# EAGLE board Schematic_proiect_1 v29 (EAGLE 9.7.0)
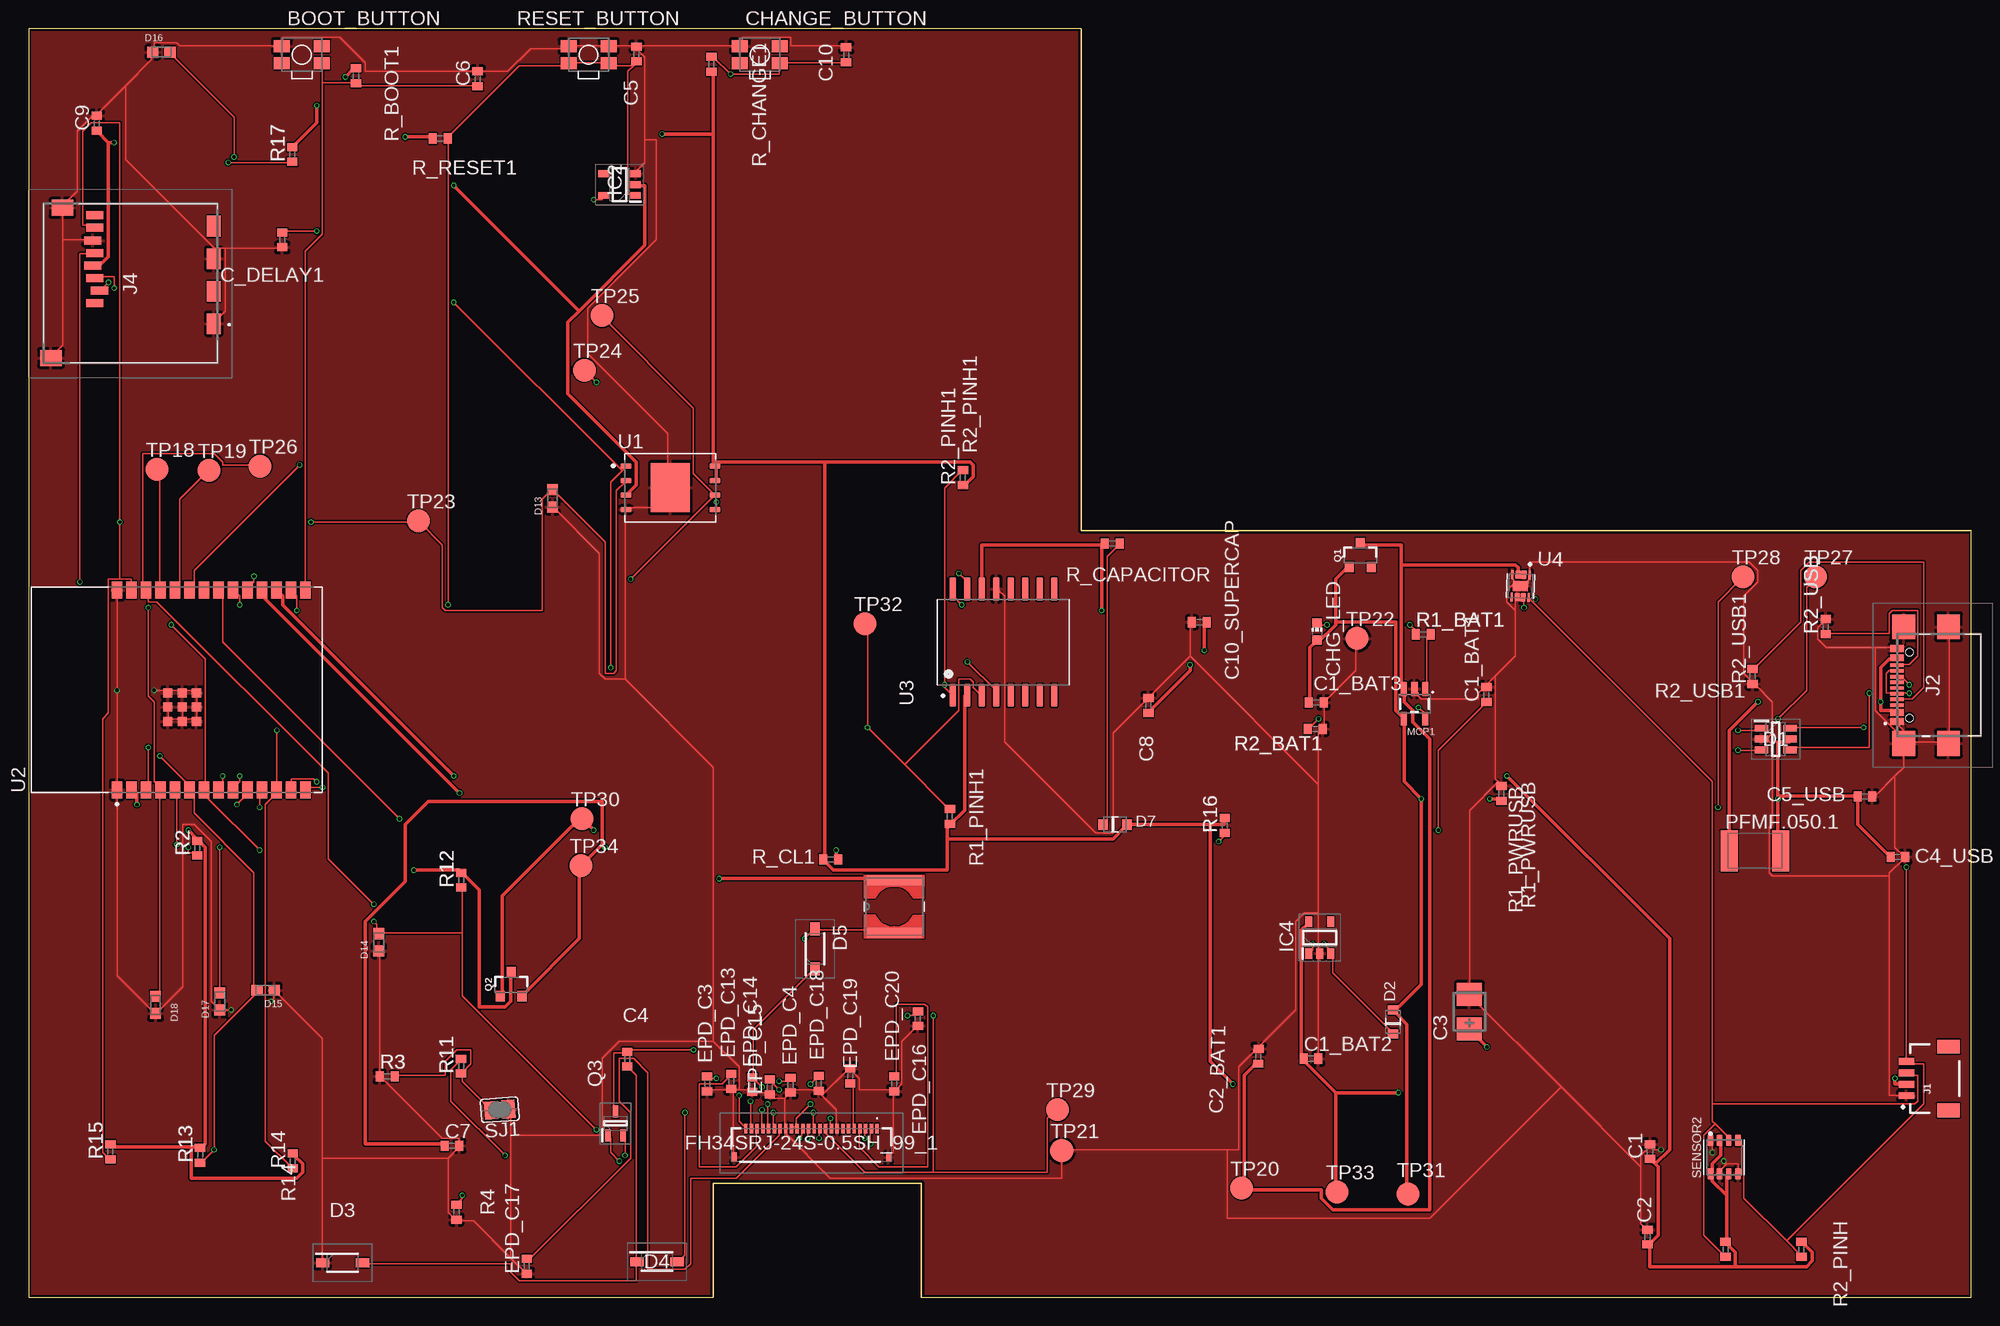
[diagram p0: board, top side]
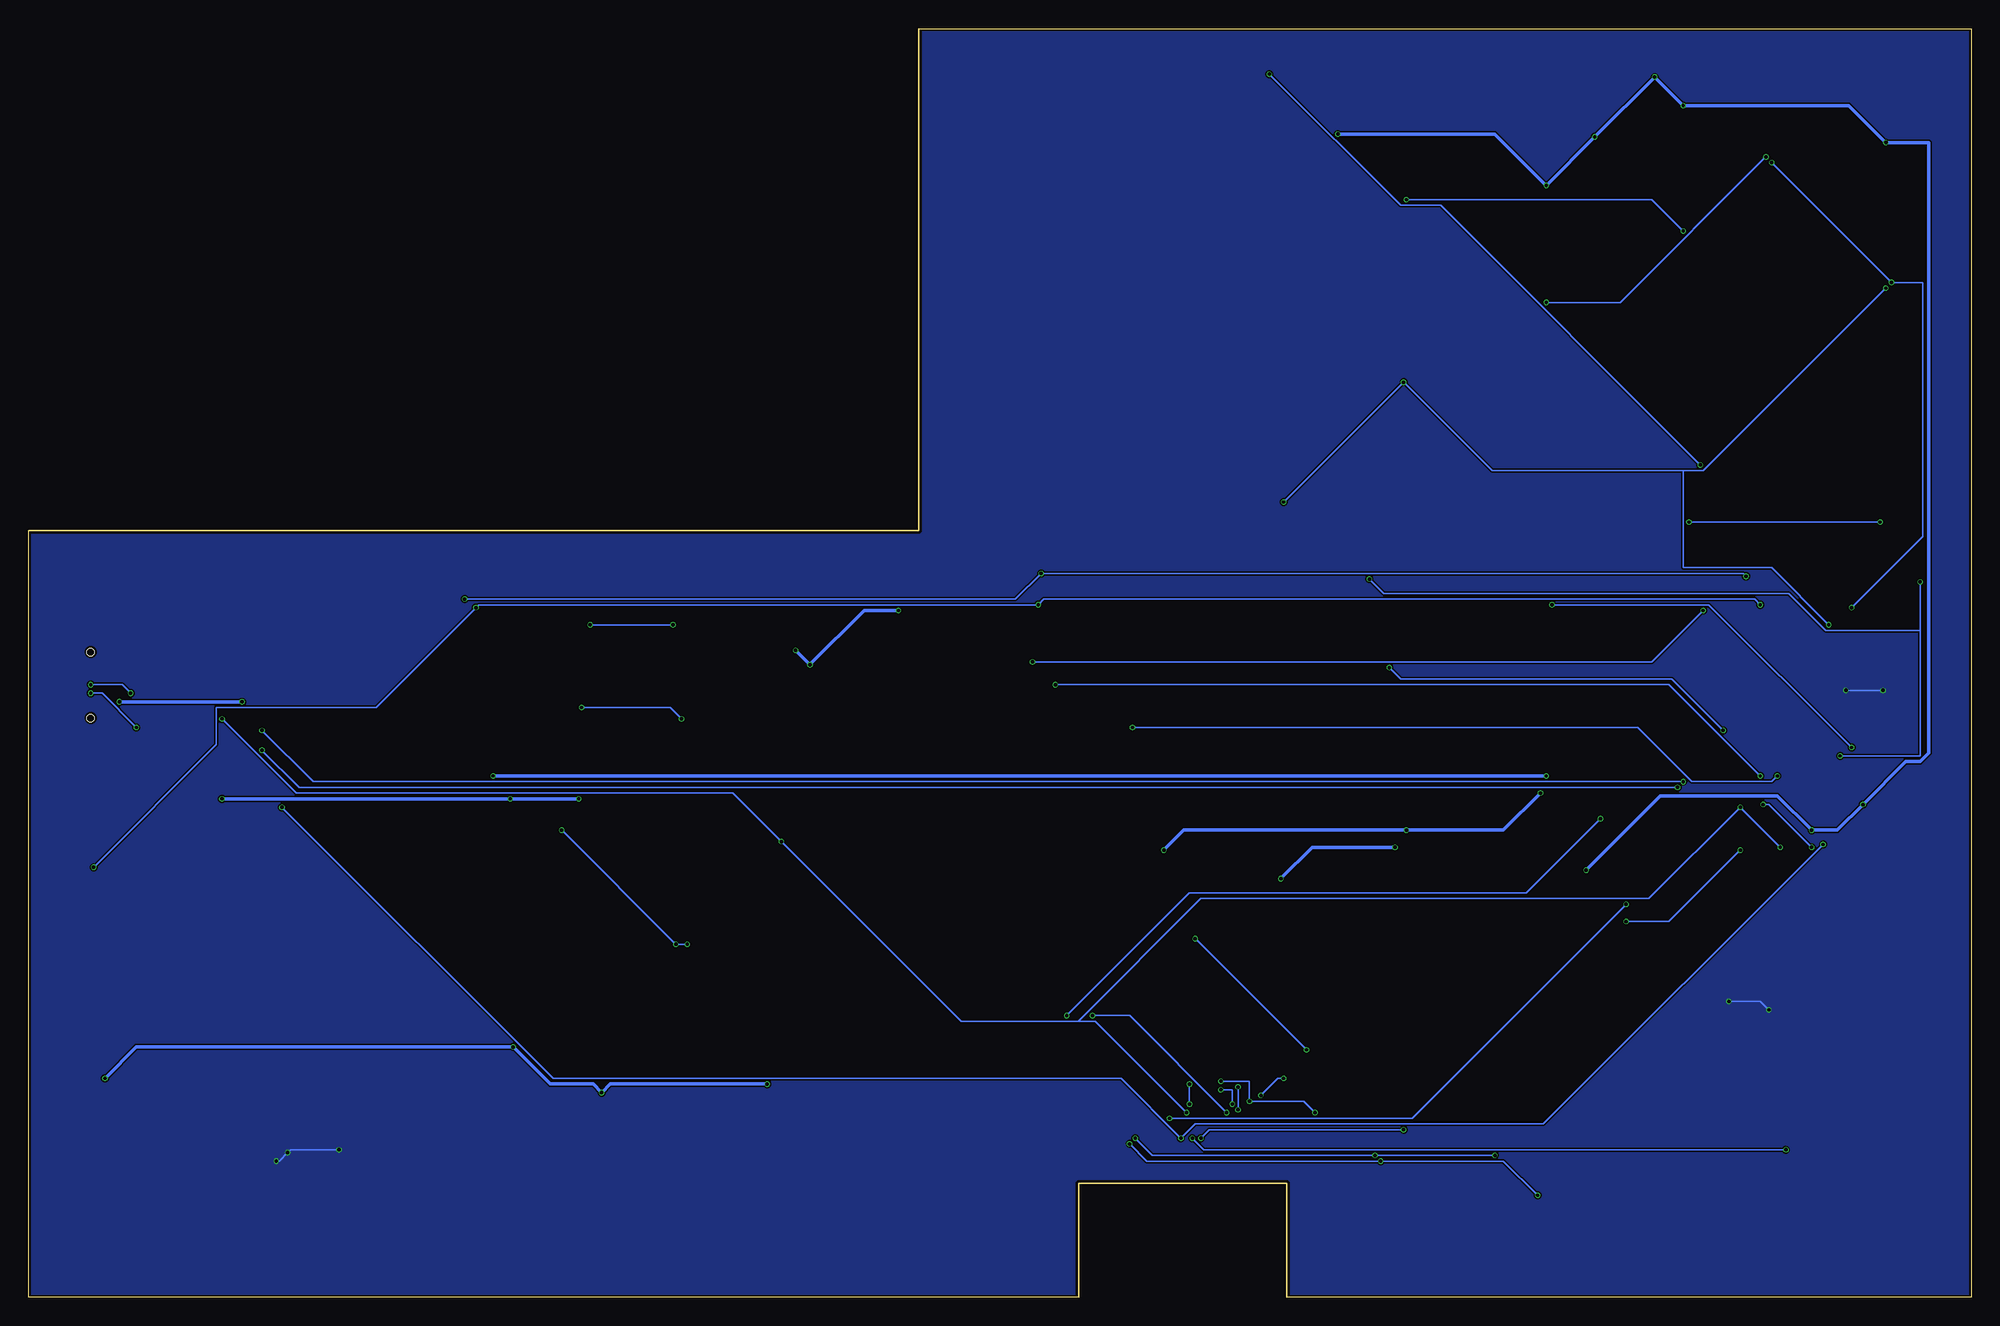
[diagram p1: board, bottom side, seen from below]

Size 170.2 x 111.2 mm. Coordinates in mm from the lower left corner, seen from the top.
Outline: 0,0 60,0 60,10 78.2,10 78.2,0 170.2,0 170.2,67.2 92.2,67.2 92.2,111.2 0,111.2 0,0
Copper layers (1*16): Top 0.035mm / dielectric 1.6mm / Bottom 0.035mm
Design rules "jlcpcb-2layers.dru": minimum track width 5mil, minimum drill 0.3mm, track to track 5mil, track to pad 5mil, pad to pad 5mil, via to via 5mil, smd to smd 5mil, copper to edge 0.2mm, drill to drill 6mil, minimum pad ring 10mil, minimum via ring 3mil, stop-mask expansion 4mil, vias tented up to drill 0mil, thermal gap 10mil
Net classes: 0 default: width 0.15 mm; 1 power: width 0.3 mm

## Footprints (pad centres in the part's own frame; a part is rotated, then mirrored left to right if it is on the bottom)
MYBUTTON = smd 1.4 x 1.05: 1 1.75,0.75; 2 -1.75,0.75; 3 -1.75,-0.75; 4 1.75,-0.75
EAGLE-LTSPICE_C0402 = smd 0.7 x 0.9: 1 -0.65,0; 2 0.65,0
RCL_CT3528 = smd 2 x 2.2: + -1.5,0; - 1.5,0
ADAFRUIT_CHIP-LED0603 = smd 0.8 x 0.8: A 0,-0.75; C 0,0.75
SOT95P280X145-6N = smd 1.2 x 0.6: 1 -1.25,0.95; 2 -1.25,0; 3 -1.25,-0.95; 4 1.25,-0.95; 5 1.25,0; 6 1.25,0.95
ESP32_WROVER_AVX---SD0805S020S1R0_AVX_SD0805S020S1R0_0 = smd 0.8 x 0.9: 1 -1.05,0; 2 1.05,0
SOD3716X135N = smd 1.15 x 0.8: 1 -1.75,0; 2 1.75,0
DIOC1608X36N = smd 0.97 x 0.94: 1 -0.75,0; 2 0.75,0
FH34SRJ24S05SH99 = smd 0.3 x 0.8: 1 5.75,1.45; 2 5.25,1.45; 3 4.75,1.45; 4 4.25,1.45; 5 3.75,1.45; 6 3.25,1.45; 7 2.75,1.45; 8 2.25,1.45; 9 1.75,1.45; 10 1.25,1.45; 11 0.75,1.45; 12 0.25,1.45; 13 -0.25,1.45; 14 -0.75,1.45; 15 -1.25,1.45; 16 -1.75,1.45; 17 -2.25,1.45; 18 -2.75,1.45; 19 -3.25,1.45; 20 -3.75,1.45; 21 -4.25,1.45; 22 -4.75,1.45; 23 -5.25,1.45; 24 -5.75,1.45 | smd 0.4 x 0.8: MP1 6.75,-1.05; MP2 -6.75,-1.05
SOT95P280X125-5N = smd 0.9 x 0.6: 1 -1.4,0.95; 2 -1.4,0; 3 -1.4,-0.95; 4 1.4,-0.95; 5 1.4,0.95
SOT95P280X120-5N = smd 0.9 x 0.6: 1 -1.4,0.95; 2 -1.4,0; 3 -1.4,-0.95; 4 1.4,-0.95; 5 1.4,0.95
JST04_1MM_RA = smd 0.6 x 1.35: 1 -1.5,0; 2 -0.5,0; 3 0.5,0; 4 1.5,0 | smd 1.2 x 2: NC1 2.8,-3.675; NC2 -2.8,-3.675
SAMACSYS_PARTS_USB4110GFA = smd 0.3 x 1.15: A1 -3.35,3.678; A4 -2.55,3.678; A5 -1.25,3.678; A6 -0.25,3.678; A7 0.25,3.678; A8 1.25,3.678; A9 2.55,3.678; A12 3.35,3.678; B1 3.05,3.678; B4 2.25,3.678; B5 1.75,3.678; B6 0.75,3.678; B7 -0.75,3.678; B8 -1.75,3.678; B9 -2.25,3.678; B12 -3.05,3.678 | smd 2.18 x 2: MP1 -5.11,-0.827; MP2 5.11,-0.827; MP3 -5.11,3.103; MP4 5.11,3.103 | hole 0.65: -2.89,2.603; 2.89,2.603
112ATAARR03ATTEND = smd 1.8 x 1.2: G1 10.6,10.4; G2 4.9,10.4; S1 7.75,10.4; S2 2.05,10.4 | smd 1.4 x 1.9: G3 13.6,-3.85; G4 0.45,-2.85 | smd 0.7 x 1.5: P1 8.8,0; P2 7.7,0.4; P3 6.6,0; P4 5.5,-0.2; P5 4.4,0; P6 3.3,-0.2; P7 2.2,0; P8 1.1,0
IND_4828-WE-TPC_WRE = smd 0.889 x 4.826: 1 -2.286,0; 2 2.286,0
ESP32_WROVER_SPARKFUN-IC-POWER_SOT23-5 = smd 0.55 x 1.2: 1 -0.95,-1.3; 2 0,-1.3; 3 0.95,-1.3; 4 0.95,1.3; 5 -0.95,1.3
ESP32C6_VARISTOR_CT/CN1812 = smd 1.5 x 3.6: 1 -2.25,0; 2 2.25,0
ESP32_WROVER_SPARKFUN-DISCRETESEMI_SOT23-3 = smd 0.8 x 0.9: 1 -0.95,-1; 2 0.95,-1; 3 0,1.1
SOT65P210X110-3N = smd 1.05 x 0.5: 1 -1.05,0.65; 2 -1.05,-0.65; 3 1.05,0
ESP32_WROVER_EAGLE-LTSPICE_R0402 = smd 0.7 x 0.9: 1 -0.65,0; 2 0.65,0
ESP32_WROVER_BME680_PSON80P300X300X100-8N = smd 1.016 x 0.5: 1 1.458,1.2; 2 1.458,0.4; 3 1.458,-0.4; 4 1.458,-1.2; 5 -1.458,-1.22; 6 -1.458,-0.4; 7 -1.458,0.4; 8 -1.458,1.2
SJ = smd 1.168 x 1.6: 1 -0.762,0; 2 0.762,0
TP20R = smd 2 x 2: TP 0,0
SON127P600X800X80-9N = smd 0.94 x 0.44: 1 -3.895,1.905; 2 -3.895,0.635; 3 -3.895,-0.635; 4 -3.895,-1.905; 5 3.895,-1.905; 6 3.895,-0.635; 7 3.895,0.635; 8 3.895,1.905 | smd 3.4 x 4.3: 9 0,0
XCVR_ESP32-C6-WROOM-1-N8 = smd 1.5 x 0.9: 1 -8.75,5.26; 2 -8.75,3.99; 3 -8.75,2.72; 4 -8.75,1.45; 5 -8.75,0.18; 6 -8.75,-1.09; 7 -8.75,-2.36; 8 -8.75,-3.63; 9 -8.75,-4.9; 10 -8.75,-6.17; 11 -8.75,-7.44; 12 -8.75,-8.71; 13 -8.75,-9.98; 14 -8.75,-11.25; 15 8.75,-11.25; 16 8.75,-9.98; 17 8.75,-8.71; 18 8.75,-7.44; 19 8.75,-6.17; 20 8.75,-4.9; 21 8.75,-3.63; 22 8.75,-2.36; 23 8.75,-1.09; 24 8.75,0.18; 25 8.75,1.45; 26 8.75,2.72; 27 8.75,3.99; 28 8.75,5.26 | smd 0.8 x 0.8: 29_1 -2.755,0.79; 29_2 -1.505,0.79; 29_3 -0.255,0.79; 29_4 -2.755,-0.46; 29_5 -1.505,-0.46; 29_6 -0.255,-0.46; 29_7 -2.755,-1.71; 29_8 -1.505,-1.71; 29_9 -0.255,-1.71
SOIC127P1032X265-16N = smd 2.05 x 0.59: 1 -4.655,4.445; 2 -4.655,3.175; 3 -4.655,1.905; 4 -4.655,0.635; 5 -4.655,-0.635; 6 -4.655,-1.905; 7 -4.655,-3.175; 8 -4.655,-4.445; 9 4.655,-4.445; 10 4.655,-3.175; 11 4.655,-1.905; 12 4.655,-0.635; 13 4.655,0.635; 14 4.655,1.905; 15 4.655,3.175; 16 4.655,4.445
SON50P200X200X80-9N = smd 0.76 x 0.27: 1 -0.985,0.75; 4 -0.985,-0.75; 5 0.985,-0.75; 8 0.985,0.75 | smd 0.762 x 0.483: 2 -0.985,0.25; 3 -0.985,-0.25; 6 0.985,-0.25; 7 0.985,0.25 | smd 0.9 x 1.3: 9 0,0

## Placement (x,y rotation side)
BOOT_BUTTON  BUTTON_CUSYOMV1  [MYBUTTON]  23.94,108.91 0 top
C1  100uF  [EAGLE-LTSPICE_C0402]  142.04,12.79 90 top
C1_BAT1  4.7uF  [EAGLE-LTSPICE_C0402]  127.71,52.83 90 top
C1_BAT2  4.7uF  [EAGLE-LTSPICE_C0402]  112.35,20.93 0 top
C1_BAT3  4.7uF  [EAGLE-LTSPICE_C0402]  112.79,52.13 0 top
C2  100uF  [EAGLE-LTSPICE_C0402]  141.82,5.29 90 top
C2_BAT1  4.7uF  [EAGLE-LTSPICE_C0402]  107.73,21.13 88.3 top
C3  100uF  [RCL_CT3528]  126.22,25.05 90 top
C4  10uF  [EAGLE-LTSPICE_C0402]  52.45,20.89 90 top
C4_USB  100nF  [EAGLE-LTSPICE_C0402]  163.77,38.61 0 top
C5  1uF  [EAGLE-LTSPICE_C0402]  53.25,108.97 90 top
C5_USB  100nF  [EAGLE-LTSPICE_C0402]  160.88,43.91 0 top
C6  100nF  [EAGLE-LTSPICE_C0402]  39.34,106.79 90 top
C7  10uF  [EAGLE-LTSPICE_C0402]  37.1,13.29 0 top
C8  100uF  [EAGLE-LTSPICE_C0402]  98.1,51.89 90 top
C9  100nF  [EAGLE-LTSPICE_C0402]  5.98,102.89 90 top
C10  100nF  [EAGLE-LTSPICE_C0402]  71.62,108.89 90 top
C10_SUPERCAP  100uF  [EAGLE-LTSPICE_C0402]  102.56,59.17 180 top
C_DELAY1  100nF  [EAGLE-LTSPICE_C0402]  22.23,92.67 90 top
CHANGE_BUTTON  BUTTON_CUSYOMV1  [MYBUTTON]  64.06,108.91 0 top
CHG_LED  [ADAFRUIT_CHIP-LED0603]  112.87,58.35 0 top
D1  USBLC6-2SC6Y  [SOT95P280X145-6N]  153.05,48.93 0 top
D2  ESP32_WROVER_AVX---SD0805S020S1R0_AVX_SD0805S020S1R0_0_0AVX_SD0805S020S1R0_0_0  [ESP32_WROVER_AVX---SD0805S020S1R0_AVX_SD0805S020S1R0_0]  119.52,24.14 90 top
D3  MBR0530  [SOD3716X135N]  27.51,3.04 0 top
D4  MBR0530  [SOD3716X135N]  55.05,3.14 0 top
D5  MBR0530  [SOD3716X135N]  68.89,30.54 90 top
D7  ESP32_WROVER_AVX---SD0805S020S1R0_AVX_SD0805S020S1R0_0_0AVX_SD0805S020S1R0_0_0  [ESP32_WROVER_AVX---SD0805S020S1R0_AVX_SD0805S020S1R0_0]  95.17,41.44 0 top
D13  PGB1010603MR  [DIOC1608X36N]  45.9,70.03 90 top
D14  PGB1010603MR  [DIOC1608X36N]  30.68,31.13 90 top
D15  PGB1010603MR  [DIOC1608X36N]  20.76,26.93 180 top
D16  PGB1010603MR  [DIOC1608X36N]  11.64,109.13 0 top
D17  PGB1010603MR  [DIOC1608X36N]  16.75,25.94 90 top
D18  PGB1010603MR  [DIOC1608X36N]  11.13,25.64 90 top
EPD_C3  1uF/50V  [EAGLE-LTSPICE_C0402]  59.44,18.71 90 top
EPD_C4  1uF/50V  [EAGLE-LTSPICE_C0402]  66.75,18.61 90 top
EPD_C13  1uF/50V  [EAGLE-LTSPICE_C0402]  61.55,18.95 90 top
EPD_C14  1uF/50V  [EAGLE-LTSPICE_C0402]  63.39,18.65 90 top
EPD_C15  1uF/50V  [EAGLE-LTSPICE_C0402]  64.93,18.45 90 top
EPD_C16  1uF/50V  [EAGLE-LTSPICE_C0402]  77.91,24.43 90 top
EPD_C17  1uF/50V  [EAGLE-LTSPICE_C0402]  43.65,2.73 90 top
EPD_C18  0.1uF/50V  [EAGLE-LTSPICE_C0402]  69.23,18.75 90 top
EPD_C19  1uF/50V  [EAGLE-LTSPICE_C0402]  71.99,19.43 270 top
EPD_C20  1uF/50V  [EAGLE-LTSPICE_C0402]  75.83,18.73 90 top
FH34SRJ-24S-0.5SH_99_1  FH34SRJ-24S-0.5SH_99_  [FH34SRJ24S05SH99]  68.58,13.35 0 top
IC2  BD5229G-TR  [SOT95P280X125-5N]  51.77,97.53 180 top
IC4  XC6220A331MR-G  [SOT95P280X120-5N]  113.11,31.53 90 top
J1  QWIIC_RIGHT_ANGLE  [JST04_1MM_RA]  164.51,19.19 90 top
J2  SAMACSYS_PARTS_USB4110-GF-A  [SAMACSYS_PARTS_USB4110GFA]  167.36,53.66 90 top
J4  112A-TAAR-R03_ATTEND  [112ATAARR03ATTEND]  5.82,95.93 270 top
L1  744043680IND_4828-WE-TPC_WRE  [IND_4828-WE-TPC_WRE]  75.83,34.25 89.9 top
MCP1  ESP32_WROVER_SPARKFUN-IC-POWER_MCP73831  [ESP32_WROVER_SPARKFUN-IC-POWER_SOT23-5]  121.41,52.02 180 top
PFMF.050.1  ESP32C6_VARISTORCN1812  [ESP32C6_VARISTOR_CT/CN1812]  151.23,39.14 0 top
Q1  20V/4.2A/52mΩ/1.4W  [ESP32_WROVER_SPARKFUN-DISCRETESEMI_SOT23-3]  116.66,65.01 0 top
Q2  20V/4.2A/52mΩ/1.4W  [ESP32_WROVER_SPARKFUN-DISCRETESEMI_SOT23-3]  42.28,27.41 0 top
Q3  SI1308EDL-T1-GE3  [SOT65P210X110-3N]  51.42,15.24 90 top
R1_BAT1  200  [ESP32_WROVER_EAGLE-LTSPICE_R0402]  122.18,58.11 0 top
R1_PINH  10k  [ESP32_WROVER_EAGLE-LTSPICE_R0402]  148.66,4.21 90 top
R1_PINH1  10k  [ESP32_WROVER_EAGLE-LTSPICE_R0402]  80.71,42.15 90 top
R1_PWRUSB  100k  [ESP32_WROVER_EAGLE-LTSPICE_R0402]  129.02,44.17 270 top
R2  10k  [ESP32_WROVER_EAGLE-LTSPICE_R0402]  14.77,39.37 90 top
R2_BAT1  2K  [ESP32_WROVER_EAGLE-LTSPICE_R0402]  112.72,49.81 180 top
R2_PINH  10k  [ESP32_WROVER_EAGLE-LTSPICE_R0402]  155.3,4.21 90 top
R2_PINH1  10k  [ESP32_WROVER_EAGLE-LTSPICE_R0402]  81.85,71.85 90 top
R2_USB  5k1  [ESP32_WROVER_EAGLE-LTSPICE_R0402]  157.43,58.79 90 top
R2_USB1  5k1  [ESP32_WROVER_EAGLE-LTSPICE_R0402]  151.02,54.43 90 top
R3  2.2  [ESP32_WROVER_EAGLE-LTSPICE_R0402]  31.41,19.37 0 top
R4  10k  [ESP32_WROVER_EAGLE-LTSPICE_R0402]  37.49,7.47 90 top
R11  0.47  [ESP32_WROVER_EAGLE-LTSPICE_R0402]  37.89,20.27 90 top
R12  10K  [ESP32_WROVER_EAGLE-LTSPICE_R0402]  37.91,36.57 90 top
R13  10K  [ESP32_WROVER_EAGLE-LTSPICE_R0402]  15.03,12.47 90 top
R14  10K  [ESP32_WROVER_EAGLE-LTSPICE_R0402]  23.15,11.97 90 top
R15  10K  [ESP32_WROVER_EAGLE-LTSPICE_R0402]  7.17,12.77 90 top
R16  10K  [ESP32_WROVER_EAGLE-LTSPICE_R0402]  104.79,41.37 90 top
R17  10K  [ESP32_WROVER_EAGLE-LTSPICE_R0402]  23.11,100.17 90 top
R_BOOT1  10K  [ESP32_WROVER_EAGLE-LTSPICE_R0402]  28.69,107.05 90 top
R_CAPACITOR  10k  [ESP32_WROVER_EAGLE-LTSPICE_R0402]  94.92,66.07 0 top
R_CHANGE1  10K  [ESP32_WROVER_EAGLE-LTSPICE_R0402]  59.82,108.07 270 top
R_CL1  10k  [ESP32_WROVER_EAGLE-LTSPICE_R0402]  70.26,38.39 180 top
R_RESET1  10K  [ESP32_WROVER_EAGLE-LTSPICE_R0402]  36.06,101.57 180 top
RESET_BUTTON  BUTTON_CUSYOMV1  [MYBUTTON]  49.06,108.91 0 top
SENSOR2  ESP32_WROVER_BME680_BME680  [ESP32_WROVER_BME680_PSON80P300X300X100-8N]  148.54,12.3 90 top
SJ1  [SJ]  41.28,16.45 184.1 top
TP18  TPTP20R  [TP20R]  11.26,72.57 0 top
TP19  TPTP20R  [TP20R]  15.81,72.47 0 top
TP20  TPTP20R  [TP20R]  106.26,9.57 0 top
TP21  TPTP20R  [TP20R]  90.51,12.87 0 top
TP22  TPTP20R  [TP20R]  116.39,57.75 0 top
TP23  TPTP20R  [TP20R]  34.14,68.05 0 top
TP24  TPTP20R  [TP20R]  48.69,81.25 0 top
TP25  TPTP20R  [TP20R]  50.24,86.05 0 top
TP26  TPTP20R  [TP20R]  20.29,72.85 0 top
TP27  TPTP20R  [TP20R]  156.54,63.15 0 top
TP28  TPTP20R  [TP20R]  150.19,63.15 0 top
TP29  TPTP20R  [TP20R]  90.14,16.45 0 top
TP30  TPTP20R  [TP20R]  48.49,41.95 0 top
TP31  TPTP20R  [TP20R]  120.84,9.05 0 top
TP32  TPTP20R  [TP20R]  73.29,59.05 0 top
TP33  TPTP20R  [TP20R]  114.64,9.25 0 top
TP34  TPTP20R  [TP20R]  48.39,37.85 0 top
U1  W25Q512JVEIQ  [SON127P600X800X80-9N]  56.22,70.96 0 top
U2  ESP32-C6-WROOM-1-N8  [XCVR_ESP32-C6-WROOM-1-N8]  13,53.24 90 top
U3  DS3231SN#  [SOIC127P1032X265-16N]  85.39,57.42 90 top
U4  MAX17048G+T10  [SON50P200X200X80-9N]  130.7,62.35 267.8 top

## Library data of the parts
BOOT_BUTTON CHANGE_BUTTON CHG_LED PFMF.050.1 RESET_BUTTON SJ1 TP18-TP34 = DeskAssistant v19 v1
C1 C1_BAT1-C1_BAT3 C2 C2_BAT1 C4 C4_USB C5 C5_USB C6-C10 C10_SUPERCAP C_DELAY1 EPD_C3 EPD_C4 EPD_C13-EPD_C20 = DeskAssistant v19 v1; SPICEMODEL: NONE; SPICEPREFIX: C
C3 = DeskAssistant v19 v1; SPICEPREFIX: C
D1 = DeskAssistant v19 v1; AVAILABILITY: In Stock; CHECK_PRICES: https://www.snapeda.com/parts/USBLC6-2SC6Y/STMicroelectronics/view-part/?ref=eda; DESCRIPTION: 17V Clamp 5A (8/20µs) Ipp Tvs Diode Surface Mount SOT-23-6; MF: STMicroelectronics; MP: USBLC6-2SC6Y; PACKAGE: SOT-23-6 STMicroelectronics; PRICE: None; SNAPEDA_LINK: https://www.snapeda.com/parts/USBLC6-2SC6Y/STMicroelectronics/view-part/?ref=snap
D2 D7 = DeskAssistant v19 v1; CENTROID_NOT_SPECIFIED: No; DATASHEET: http://datasheets.avx.com/schottky.pdf; DIGIKEY_DESCRIPTION: DIODE SCHOTTKY 20V 1A 0805; DIGIKEY_PART_NUMBER: 478-7800-1-ND; LEAD_FREE: yes; MF: AVX; MOUSER_PART_NUMBER: 581-SD0805S020S1R0; PACKAGE: 0805 (2012 metric); PREFIX: D; ROHS: yes; TEMPERATURE_RANGE_HIGH: +125°C; TEMPERATURE_RANGE_LOW: -55°C
D3-D5 = DeskAssistant v19 v1; AVAILABILITY: In Stock; CHECK_PRICES: https://www.snapeda.com/parts/MBR0530/Onsemi/view-part/?ref=eda; DESCRIPTION: Diode Schottky 30 V 500mA Surface Mount SOD-123; MF: ON Semiconductor; MP: MBR0530; PACKAGE: SOD-123-2 ON Semiconductor; PRICE: None; PURCHASE-URL: https://www.snapeda.com/api/url_track_click_mouser/?unipart_id=179458&manufacturer=ON Semiconductor&part_name=MBR0530&search_term=None; SNAPEDA_LINK: https://www.snapeda.com/parts/MBR0530/Onsemi/view-part/?ref=snap
D13-D18 = DeskAssistant v19 v1; AVAILABILITY: In Stock; CHECK_PRICES: https://www.snapeda.com/parts/PGB1010603MR/Littelfuse/view-part/?ref=eda; DESCRIPTION: 150V (Typ) Clamp - Ipp Tvs Diode Surface Mount 0603 (1608 Metric); MF: Littelfuse Inc.; MP: PGB1010603MR; PACKAGE: 0603 Littelfuse Inc.; PRICE: None; PURCHASE-URL: https://www.snapeda.com/api/url_track_click_mouser/?unipart_id=5659453&manufacturer=Littelfuse Inc.&part_name=PGB1010603MR&search_term=None; SNAPEDA_LINK: https://www.snapeda.com/parts/PGB1010603MR/Littelfuse/view-part/?ref=snap
FH34SRJ-24S-0.5SH_99_1 = DeskAssistant v19 v1; DESCRIPTION: 24 Position FFC, FPC Connector Contacts, Top and Bottom 0.020" (0.50mm) Surface Mount, Right Angle; HEIGHT: 1.1mm; MANUFACTURER_NAME: Hirose; MANUFACTURER_PART_NUMBER: FH34SRJ-24S-0.5SH(99); MOUSER_PART_NUMBER: 798-FH34SRJ24S05SH99; MOUSER_PRICE-STOCK: https://www.mouser.co.uk/ProductDetail/Hirose-Connector/FH34SRJ-24S-0.5SH99?qs=vcbW%252B4%252BSTIpKBl5ap9J8Fw%3D%3D
IC2 = DeskAssistant v19 v1; DESCRIPTION: Voltage Detector with Adjustable Delay Time: CMOS processes are utilized to develop high precision, low current consumption CMOS reset ICs that allow arbitrary setting of the delay time. The extensive lineup includes both Nch Open Drain and CMOS output types in a wide range of detection voltages (from 2.3V to 6.0V, in 0.1V steps), enabling selection of the ideal solution based on customer requirements. In addition, the entire series is of course both lead-free and RoHS-compliant.; HEIGHT: 1.25mm; MANUFACTURER_NAME: ROHM Semiconductor; MANUFACTURER_PART_NUMBER: BD5229G-TR; MOUSER_PART_NUMBER: 755-BD5229G-TR; MOUSER_PRICE-STOCK: https://www.mouser.co.uk/ProductDetail/ROHM-Semiconductor/BD5229G-TR?qs=4kLU8WoGk0vvnhrrYwdszw%3D%3D
IC4 = DeskAssistant v19 v1; DESCRIPTION: LDO Voltage Regulators; HEIGHT: 1.2mm; MANUFACTURER_NAME: Torex; MANUFACTURER_PART_NUMBER: XC6220A331MR-G; MOUSER_PART_NUMBER: 865-XC6220A331MR-G; MOUSER_PRICE-STOCK: https://www.mouser.co.uk/ProductDetail/Torex-Semiconductor/XC6220A331MR-G?qs=AsjdqWjXhJ8ZSWznL1J0gg%3D%3D
J1 = DeskAssistant v19 v1; PROD_ID: CONN-13694
J2 = DeskAssistant v19 v1; DESCRIPTION: CONN USB 2.0 TYPE-C R/A SMT; HEIGHT: 3.26mm; MANUFACTURER_NAME: GCT (GLOBAL CONNECTOR TECHNOLOGY); MANUFACTURER_PART_NUMBER: USB4110-GF-A; MOUSER_PART_NUMBER: 640-USB4110-GF-A; MOUSER_PRICE-STOCK: https://www.mouser.co.uk/ProductDetail/GCT/USB4110-GF-A?qs=KUoIvG%2F9IlYiZvIXQjyJeA%3D%3D
J4 = DeskAssistant v19 v1; DESCRIPTION: Micro SD Card Socket, Push-Push Type, Top Mount, SMT, H=1.83mm, 10u; HEIGHT: 1.9mm; MANUFACTURER_NAME: ATTEND; MANUFACTURER_PART_NUMBER: 112A-TAAR-R03 ATTEND
L1 = DeskAssistant v19 v1; COPYRIGHT: Copyright (C) 2024 Ultra Librarian. All rights reserved.; MANUFACTURER_PART_NUMBER: 744043680; MFR_NAME: Wurth Electronics
MCP1 = DeskAssistant v19 v1; PROD_ID: IC-09995
Q1 Q2 = DeskAssistant v19 v1; PROD_ID: TRAN-14388
Q3 = DeskAssistant v19 v1; AVAILABILITY: In Stock; CHECK_PRICES: https://www.snapeda.com/parts/SI1308EDL-T1-GE3/Vishay+Siliconix/view-part/?ref=eda; DESCRIPTION: Si1308EDL-T1-GE3 N-channel MOSFET Transistor, 1.5 A, 30 V, 3-Pin SC-70 | Siliconix / Vishay SI1308EDL-T1-GE3; MF: Vishay Siliconix; MP: SI1308EDL-T1-GE3; PACKAGE: SOT-323 Vishay Semiconductor; PRICE: None; PURCHASE-URL: https://www.snapeda.com/api/url_track_click_mouser/?unipart_id=274603&manufacturer=Vishay Siliconix&part_name=SI1308EDL-T1-GE3&search_term=None; SNAPEDA_LINK: https://www.snapeda.com/parts/SI1308EDL-T1-GE3/Vishay+Siliconix/view-part/?ref=snap
R1_BAT1 R1_PINH R1_PINH1 R1_PWRUSB R2 R2_BAT1 R2_PINH R2_PINH1 R2_USB R2_USB1 R3 R4 R11-R17 R_BOOT1 R_CAPACITOR R_CHANGE1 R_CL1 R_RESET1 = DeskAssistant v19 v1; SPICEMODEL: NONE; SPICEPREFIX: R
SENSOR2 = DeskAssistant v19 v1; AVAILABILITY: Unavailable; DESCRIPTION: Integrated Environmental Unit; MF: Bosch Sensortec; MP: BME680; PACKAGE: LGA-8 Bosch Tools; PRICE: None
U1 = DeskAssistant v19 v1; AVAILABILITY: In Stock; CHECK_PRICES: https://www.snapeda.com/parts/W25Q512JVEIQ/Winbond+Electronics/view-part/?ref=eda; DESCRIPTION: FLASH - NOR Memory IC 512Mb (64M x 8) SPI - Quad I/O 133 MHz 8-WSON (8x6); MF: Winbond Electronics; MP: W25Q512JVEIQ; PACKAGE: Package; PRICE: None; SNAPEDA_LINK: https://www.snapeda.com/parts/W25Q512JVEIQ/Winbond+Electronics/view-part/?ref=snap
U2 = DeskAssistant v19 v1; AVAILABILITY: In Stock; CHECK_PRICES: https://www.snapeda.com/parts/ESP32-C6-WROOM-1-N8/Espressif+Systems/view-part/?ref=eda; DESCRIPTION: Multiprotocol Modules ESP32-C6 module, Wi-Fi 6 in 2.4 GHz band, Bluetooth 5, Zigbee 3.0 and Thread. ESP34-WROOM Compatible - ENGINEERING SAMPLE; MF: Espressif Systems; MP: ESP32-C6-WROOM-1-N8; PACKAGE: None; PRICE: None; SNAPEDA_LINK: https://www.snapeda.com/parts/ESP32-C6-WROOM-1-N8/Espressif+Systems/view-part/?ref=snap
U3 = DeskAssistant v19 v1; AVAILABILITY: In Stock; CHECK_PRICES: https://www.snapeda.com/parts/DS3231SN%23/Analog+Devices/view-part/?ref=eda; DESCRIPTION: Extremely Accurate I²C-Integrated RTC/TCXO/Crystal; MF: Analog Devices; MP: DS3231SN#; PACKAGE: SOIC-16 Maxim; PRICE: None; PURCHASE-URL: https://www.snapeda.com/api/url_track_click_mouser/?unipart_id=99048&manufacturer=Analog Devices&part_name=DS3231SN#&search_term=None; SNAPEDA_LINK: https://www.snapeda.com/parts/DS3231SN%23/Analog+Devices/view-part/?ref=snap
U4 = DeskAssistant v19 v1; AVAILABILITY: In Stock; CHECK_PRICES: https://www.snapeda.com/parts/MAX17048G+T10/Analog+Devices/view-part/?ref=eda; DESCRIPTION: 3µA 1-Cell/2-Cell Fuel Gauge with ModelGauge; MF: Analog Devices; MP: MAX17048G+T10; PACKAGE: TDFN-8 Maxim; PRICE: None; PURCHASE-URL: https://www.snapeda.com/api/url_track_click_mouser/?unipart_id=329239&manufacturer=Analog Devices&part_name=MAX17048G+T10&search_term=None; SNAPEDA_LINK: https://www.snapeda.com/parts/MAX17048G+T10/Analog+Devices/view-part/?ref=snap

## Nets
3V3 [power]: C1_BAT2.1 C3.+ C9.1 D7.2 IC2.2 IC4.5 J1.2 J4.P4 Q2.3 R1_PINH1.1 R2.2 R2_PINH1.1 R12.2 R13.2 R14.2 R15.2 R16.2 R17.2 R_BOOT1.2 R_CHANGE1.2 R_CL1.2 R_RESET1.2 TP33.TP U1.3 U1.7 U1.8 U2.2 U3.2
32KHZ: R2_PINH1.2 U2.9 U3.1
DN: D1.6 J2.A8 J2.B7
DP: D1.4 J2.A7 J2.B6
EPD_3V3 [power]: C7.1 L1.2 Q2.2 TP34.TP
EPD_3V3_C [power]: Q2.1 R_CL1.1 TP30.TP U2.18
EPD_BUSY: FH34SRJ-24S-0.5SH_99_1.9 TP26.TP U2.26
EPD_CS: D17.2 FH34SRJ-24S-0.5SH_99_1.12 R16.1 TP27.TP U2.11
EPD_DC: FH34SRJ-24S-0.5SH_99_1.11 TP28.TP U2.5
EPD_RST: FH34SRJ-24S-0.5SH_99_1.10 TP29.TP U2.21
FLASH_CS: D16.2 R14.1 U1.1 U2.12
GDR: FH34SRJ-24S-0.5SH_99_1.2 Q3.1 R4.2
GND: BOOT_BUTTON.2 C1.2 C1_BAT1.2 C1_BAT2.2 C1_BAT3.2 C2.2 C2_BAT1.2 C3.- C4_USB.2 C5.2 C5_USB.2 C6.2 C7.2 C8.2 C9.2 C10.2 C10_SUPERCAP.2 C_DELAY1.1 CHANGE_BUTTON.2 D1.2 D3.1 D13.1 D14.1 D15.1 D16.1 D17.1 D18.1 EPD_C3.1 EPD_C4.1 EPD_C13.1 EPD_C14.1 EPD_C15.1 EPD_C16.1 EPD_C17.1 EPD_C18.1 EPD_C19.1 EPD_C20.1 FH34SRJ-24S-0.5SH_99_1.8 FH34SRJ-24S-0.5SH_99_1.17 FH34SRJ-24S-0.5SH_99_1.MP1 FH34SRJ-24S-0.5SH_99_1.MP2 IC2.3 IC4.2 J1.1 J2.A1 J2.A12 J2.B1 J2.B12 J2.MP1 J2.MP2 J2.MP3 J2.MP4 J4.G1 J4.G2 J4.G3 J4.G4 J4.P6 MCP1.2 R1_PWRUSB.1 R2_BAT1.1 R2_USB1.1 R2_USB.2 R3.1 R4.1 RESET_BUTTON.1 RESET_BUTTON.2 SENSOR2.1 SENSOR2.5 SENSOR2.7 SJ1.1 TP21.TP TP22.TP U1.4 U1.9 U2.1 U2.28 U2.29_1 U2.29_2 U2.29_3 U2.29_4 U2.29_5 U2.29_6 U2.29_7 U2.29_8 U2.29_9 U3.13 U4.1 U4.4 U4.6 U4.9
GPIO8: R2.1 U2.10
I2C_PW [power]: C1.1 C2.1 R1_PINH.2 R2_PINH.2 SENSOR2.2 SENSOR2.6 SENSOR2.8 U2.17
INT_RTC: R1_PINH1.2 TP32.TP U2.8 U3.3
IO/BOOT: BOOT_BUTTON.4 C6.1 R_BOOT1.1 U2.15
IO/CHANGE: C10.1 CHANGE_BUTTON.4 R_CHANGE1.1 U2.23
MISO: D13.2 J4.P7 R15.1 TP23.TP U1.2 U2.27
MOSI: D14.2 FH34SRJ-24S-0.5SH_99_1.14 J4.P3 R12.1 TP24.TP U1.5 U2.7
N$1: EPD_C13.2 FH34SRJ-24S-0.5SH_99_1.22
N$11: J2.A5 R2_USB1.2
N$12: EPD_C18.2 FH34SRJ-24S-0.5SH_99_1.15 FH34SRJ-24S-0.5SH_99_1.16
N$15: J2.B5 R2_USB.1
N$16: C1_BAT1.1 D2.1 IC4.1 IC4.3
N$17: C4.1 D3.2 D4.1
N$18: MCP1.1 R1_BAT1.2
N$19: CHG_LED.C R1_BAT1.1
N$20: MCP1.5 R2_BAT1.2
N$21: EPD_C3.2 FH34SRJ-24S-0.5SH_99_1.24
N$22: EPD_C15.2 FH34SRJ-24S-0.5SH_99_1.20
N$23: EPD_C16.2 FH34SRJ-24S-0.5SH_99_1.19
N$24: EPD_C17.2 FH34SRJ-24S-0.5SH_99_1.18
N$25: EPD_C19.2 FH34SRJ-24S-0.5SH_99_1.5
N$26: EPD_C20.2 FH34SRJ-24S-0.5SH_99_1.4
N$27: C_DELAY1.2 IC2.5
N$28: D7.1 R_CAPACITOR.2
PREVGH: D5.1 EPD_C14.2 FH34SRJ-24S-0.5SH_99_1.21
PREVGL: D4.2 EPD_C4.2 FH34SRJ-24S-0.5SH_99_1.23
RESE: FH34SRJ-24S-0.5SH_99_1.3 Q3.2 R11.2
RESE': R3.2 R11.1 SJ1.2
RESET: C5.1 IC2.1 R_RESET1.1 RESET_BUTTON.3 RESET_BUTTON.4 U2.3
RTC_RST: U2.16 U3.4
RX: TP19.TP U2.24
SCK: D15.2 FH34SRJ-24S-0.5SH_99_1.13 J4.P5 R13.1 TP25.TP U1.6 U2.6
SCL: J1.4 R2_PINH.1 SENSOR2.4 U2.20 U3.16 U4.7
SDA: J1.3 R1_PINH.1 SENSOR2.3 U2.19 U3.15 U4.8
SRC: C4.2 D5.2 L1.1 Q3.3
SS_SD: D18.2 J4.P2 R17.1 U2.4
TX: TP18.TP U2.25
USB_D+: D1.3 U2.14
USB_D-: D1.1 U2.13
VBAT [power]: C2_BAT1.1 MCP1.3 Q1.3 TP20.TP U4.2 U4.3
VBUS [power]: C1_BAT3.1 C4_USB.1 C5_USB.1 CHG_LED.A D1.5 D2.2 MCP1.4 PFMF.050.1.2 Q1.1 R1_PWRUSB.2 TP31.TP
VRTC [power]: C8.1 C10_SUPERCAP.1 R_CAPACITOR.1 U3.14
VUSB [power]: J2.A4 J2.A9 J2.B4 J2.B9 PFMF.050.1.1

## Tracks (layer width: path | path; a pad name or v marks a point on that pad's centre or on a via)
3V3  (via drill 0.3)
  Top 0.3: Q2.3 42.25,28.45 42.25,25.95 41.75,25.45 39.5,25.45 39.5,35.7 38,37.2 R12.2 37.75,37.45 v33.75,37.45 | 14.25,13.2 7.25,13.2 R15.2 | 14.25,13.2 15,13.2 R13.2 15.25,13.2 15.5,13.45 15.5,39.45 15,39.95 R2.2 14.75,40.2 v14,40.95 | 14.25,13.2 14.25,10.45 23.5,10.45 24,10.95 24,11.7 23.25,12.45 R14.2 | v9.5,43.2 9.5,44.2 9.25,44.45 U2.2 | 48.25,86.45 47.25,85.45 47.25,79.2 53.25,73.2 53.25,71.2 52.5,70.45 U1.3 | 48.25,86.45 54,92.2 54,97.45 53.25,97.45 IC2.2 | 7,101.2 6,102.2 C9.1 | 7,101.2 7,91.2 6.25,90.45 5.75,90.45 J4.P4 | v25.25,104.45 25.25,102.95 23.25,100.95 R17.2 | v27.75,106.95 28.5,107.7 R_BOOT1.2 | v33,101.7 35.25,101.7 R_RESET1.2 | v7.5,101.2 7,101.2 | v37.25,97.45 48.25,86.45 | 114.5,17.95 111.75,20.7 C1_BAT2.1 111.5,20.95 111.5,32.2 112,32.7 IC4.5 | 114.5,17.95 114.5,9.45 TP33.TP | v163.5,19.2 163.5,18.7 J1.2 | v127.75,21.95 126.25,23.45 C3.+ | v120,17.95 114.5,17.95 | 103.5,41.45 104.75,41.45 104.75,41.95 R16.2 | 103.5,41.45 96.25,41.45 D7.2 96,41.2 95,40.2 80.5,40.2 | 80.5,40.2 80.5,41.45 R1_PINH1.1 80.75,41.45 82,42.7 82,52.7 U3.2 | 80.5,40.2 80.5,37.45 70.5,37.45 69.75,38.2 R_CL1.2 69.75,38.45 69.75,73.2 | 60,73.2 60,72.95 U1.8 60.25,72.7 60.25,71.7 U1.7 | 60,73.2 60,101.95 | 60,101.95 60,107.2 R_CHANGE1.2 | 60,73.2 69.75,73.2 | 69.75,73.2 82.5,73.2 82.75,72.95 82.75,71.95 82,71.2 R2_PINH1.1 | v105.5,18.7 103.5,20.7 103.5,41.45 | 60,101.95 v55.5,101.95
  Bottom 0.3: v33.75,37.45 27.25,43.95 17,43.95 v14,40.95 11.75,40.95 v9.5,43.2 5.75,46.95 4.5,46.95 3.75,47.7 3.75,101.2 v7.5,101.2 10.75,104.45 v25.25,104.45 v27.75,106.95 v33,101.7 v37.25,97.45 41.75,101.95 v55.5,101.95 | v163.5,19.2 160.75,21.95 v127.75,21.95 124.5,18.7 120.75,18.7 v120,17.95 119.25,18.7 v105.5,18.7
32KHZ  (via drill 0.3)
  Top 0.15: R2_PINH1.2 81.75,72.45 80.25,70.95 v80.25,53.7 80.25,53.45 80.75,52.95 U3.1 | v18.5,45.7 18.5,45.2 18,44.7 U2.9
  Bottom 0.15: v18.5,45.7 26.5,53.7 v80.25,53.7
DN  (via drill 0.3)
  Top 0.15: J2.A8 163.5,54.95 163,54.95 162.75,54.7 162.75,52.95 163.5,52.95 J2.B7 163.75,52.95 v164.75,52.95 | v160.75,49.95 154.5,49.95 D1.6
  Bottom 0.15: v160.75,49.95 163.75,52.95 v164.75,52.95
DP  (via drill 0.3)
  Top 0.15: 163.75,54.2 163.75,54.45 J2.B6 | 163.75,54.2 163.75,53.95 J2.A7 | v161.25,52.95 161.25,48.2 154.5,48.2 D1.4 | v164.75,53.7 164.25,54.2 163.75,54.2
  Bottom 0.15: v161.25,52.95 162,53.7 v164.75,53.7
EPD_3V3  (via drill 0.3)
  Top 0.3: 50.25,39.7 50.25,43.45 35,43.45 33,41.45 33,36.45 29.5,32.95 29.5,13.45 36.25,13.45 C7.1 | 50.25,39.7 48.5,37.95 TP34.TP 48.25,37.7 48.25,31.45 43.25,26.45 Q2.2 | v60.5,36.7 75.75,36.7 L1.2 | 50.25,39.7 v50.5,39.45
  Bottom 0.3: v60.5,36.7 57.75,39.45 v50.5,39.45
EPD_3V3_C  (via drill 0.3)
  Top 0.3: Q2.1 41.5,26.45 41.5,35.2 48.25,41.95 TP30.TP v49.5,40.95 | v70.75,39.2 70.75,38.45 R_CL1.1 | v37.75,44.2 20.75,61.2 20.75,61.7 20.5,61.95 U2.18
  Bottom 0.3: v70.75,39.2 69,40.95 v49.5,40.95 41,40.95 v37.75,44.2
EPD_BUSY  (via drill 0.3)
  Top 0.15: v70.25,15.7 70.25,14.95 FH34SRJ-24S-0.5SH_99_1.9 | v30.25,34.45 26.25,38.45 26.25,45.95 11.25,60.95 10.5,60.95 10.5,61.95 U2.26 10.25,62.2 10,62.45 10,73.95 16.25,73.95 17,73.2 17,72.95 20.25,72.95 TP26.TP
  Bottom 0.15: v70.25,15.7 49,15.7 v30.25,34.45
EPD_CS  (via drill 0.3)
  Top 0.15: v16.75,39.45 D17.2 | v20.25,42.95 20.25,44.45 U2.11 | v68.75,16.2 68.75,14.95 FH34SRJ-24S-0.5SH_99_1.12 | v104.25,39.95 104.75,40.45 104.75,40.7 R16.1 | v153.25,50.7 155.75,53.2 155.75,62.2 156.5,62.95 TP27.TP
  Bottom 0.15: v16.75,39.45 v20.25,42.95 28.25,34.95 67.5,34.95 78.25,24.2 | v68.75,16.2 76.75,24.2 78.25,24.2 | 78.25,24.2 88.5,24.2 v104.25,39.95 108.5,44.2 146.75,44.2 v153.25,50.7
EPD_DC  (via drill 0.3)
  Top 0.15: v69.25,13.95 69.25,14.7 FH34SRJ-24S-0.5SH_99_1.11 | v13,39.7 13,44.45 U2.5 | v148,42.95 148,60.95 150,62.95 TP28.TP
  Bottom 0.15: v13,39.7 37.5,15.2 68,15.2 v69.25,13.95 74.5,19.2 124.25,19.2 v148,42.95
EPD_RST  (via drill 0.3)
  Top 0.15: 79.25,10.95 89.25,10.95 89.25,15.7 90,16.45 TP29.TP | 79.25,10.95 73.25,10.95 69.75,14.45 69.75,14.7 FH34SRJ-24S-0.5SH_99_1.10 | v32.5,41.95 17,57.45 17,61.7 16.75,61.95 U2.21 | 79.25,10.95 v79.25,24.7
  Bottom 0.15: v32.5,41.95 39,35.45 68.5,35.45 v79.25,24.7
FLASH_CS  (via drill 0.3)
  Top 0.15: R14.1 23,11.45 20.75,13.7 20.75,43.2 21.5,43.95 21.5,44.45 U2.12 21.75,44.7 v21.75,49.7 | 52,72.45 51,71.45 v51,55.2 | 52,72.45 52.25,72.7 U1.1 | v18,99.95 18,103.45 12.5,108.95 D16.2 | 52,72.45 v37.25,87.2
  Bottom 0.15: v51,55.2 50,54.2 26.25,54.2 v21.75,49.7 | v18,99.95 30.75,87.2 v37.25,87.2
GDR  (via drill 0.3)
  Top 0.15: v73.75,13.45 73.75,14.7 FH34SRJ-24S-0.5SH_99_1.2 | v51.75,11.95 51,12.7 51,13.95 Q3.1 | v38,8.95 38,8.7 37.5,8.2 R4.2
  Bottom 0.15: v73.75,13.45 72.25,11.95 v51.75,11.95 41,11.95 v38,8.95
GND  (via drill 0.3)
  Top 0.15: 161.75,56.95 163.5,56.95 J2.A12 163.75,56.95 | 161.75,56.95 157.5,56.95 156.75,57.7 156.75,58.7 157.25,59.2 R2_USB.2 | 163.75,56.95 163.75,56.7 J2.B1 | 163.75,56.95 163.75,58.2 164.25,58.7 J2.MP4 | 152.25,48.95 152,48.7 D1.2 152.25,48.95 | 152.25,48.95 152.75,49.45 152.75,52.2 151.25,53.7 R2_USB1.1 151,53.95 150.25,54.7 150.25,61.45 151.5,62.7 151.5,63.7 150.75,64.45 131.5,64.45 131.5,63.45 U4.1 131.5,63.2 131.5,62.95 130.75,62.2 U4.9 | J2.B12 163.75,50.7 163.75,50.45 J2.A1 163.75,50.2 164.25,49.7 164.25,48.95 | 163.5,45.7 164.25,46.45 164.25,48.45 J2.MP3 | 163.5,45.7 161.75,43.95 C5_USB.2 | 163.5,45.7 163.5,39.45 164.25,38.7 C4_USB.2 164.25,38.45 163,37.2 163,36.95 | 164.25,48.95 164.25,48.7 J2.MP3 | 163,36.95 163,17.7 J1.1 | J2.MP3 164.5,48.7 168,48.7 J2.MP1 168.25,48.7 168.25,58.7 J2.MP2 | 152.25,48.95 152.75,48.45 152.75,41.45 152.5,41.2 152.5,37.2 152.75,36.95 163,36.95 | 161.75,56.95 161.75,51.45 164.25,48.95 | 164.25,48.95 J2.MP3 | 130.25,62.7 130.5,62.45 U4.9 | 130.25,62.7 130,62.95 130,63.2 U4.4 | 130.25,60.2 130.25,56.2 128.5,54.45 | 130.25,60.2 130.25,61.2 U4.6 | 128.5,54.45 127.75,53.7 C1_BAT1.2 127.5,53.45 127,52.95 127,52.45 122,52.45 121.75,52.7 121.75,52.95 121.5,53.2 MCP1.2 | 128.75,45.2 128.5,45.45 128.5,54.45 | 128.75,45.2 129,44.95 R1_PWRUSB.1 | 130.25,62.7 129.5,61.95 129.5,60.95 130.25,60.2 | 130.25,62.7 U4.9 | 148.75,11.7 148.25,11.2 148.25,10.95 SENSOR2.7 | 148.75,11.7 149.75,11.7 149.75,10.95 SENSOR2.5 | v147.5,12.7 147.5,13.7 SENSOR2.1 | 148.75,11.7 v148.5,11.95 | 141.25,11.45 141.25,12.45 142,13.2 C1.2 142.25,13.2 142.25,12.95 v143,12.95
  Top 0.15: 141.25,11.45 141.25,6.45 141.75,5.95 C2.2 | 141.25,11.45 134.25,18.45 | 134.25,18.45 126.25,26.45 C3.- 126.25,26.7 126.25,42.7 128.75,45.2 | C10.2 71.5,109.7 66.75,109.7 66.75,110.45 62.5,110.45 62.5,109.7 CHANGE_BUTTON.2 62.25,109.7 53.25,109.7 | 54,101.45 54,108.7 53.25,109.45 C5.2 53.25,109.7 | 54,101.45 54,99.45 53.25,98.7 IC2.3 | 53.25,109.7 51,109.7 RESET_BUTTON.1 50.75,109.7 47.5,109.7 RESET_BUTTON.2 47.25,109.45 44,109.45 42,107.45 39.5,107.45 C6.2 39.25,107.45 29.5,107.45 29.5,108.2 27.25,110.45 22.25,110.45 22.25,109.7 BOOT_BUTTON.2 22,109.7 13.25,109.7 13,109.95 11,109.95 11,109.2 D16.1 10.75,108.95 10.75,108.45 8.5,106.2 | 3,92.7 5.5,92.7 J4.P6 | 3,92.7 3,95.45 J4.G4 3,95.7 4.25,96.95 4.25,102.2 5.75,103.7 C9.2 6,103.7 8.5,106.2 | 3,92.7 3,83.45 2,82.45 J4.G3 | 16.25,91.95 17.25,91.95 | 17.25,91.95 22,91.95 C_DELAY1.1 | 16.25,91.95 16.25,91.2 J4.G2 | 17.25,91.95 17.25,86.45 16.25,85.45 J4.G1 | 16.25,91.95 8.5,99.7 8.5,106.2 | 12.25,50.7 12.25,51.7 U2.29_2 | 13.5,50.7 13.5,51.7 U2.29_5 | 12.25,50.7 13.25,50.7 U2.29_4 13.5,50.7 | 12.25,50.7 U2.29_1 | 13.5,50.7 14.5,50.7 U2.29_7 14.75,50.7 14.75,51.7 U2.29_8 14.75,51.95 14.75,52.95 U2.29_9 14.5,53.2 13.5,53.2 U2.29_6 13.25,53.2 12.25,53.2 U2.29_3 12,53.2 v11,53.2 | D17.1 16,25.95 16,39.95 14.5,41.45 13.5,41.45 13.5,27.2 11.25,24.95 D18.1 11,24.95 7.75,28.2 7.75,44.45 U2.1 7.75,44.7 v7.75,53.2 7.75,61.95 U2.28 | 25.75,12.2 25.75,3.2 D3.1 | 25.75,12.2 25.75,22.7 21.75,26.7 D15.1 21.5,26.7 21.5,26.2 v21.25,25.95 | D14.1 30.75,30.2 30.75,19.45 R3.1 31,19.2 36.25,13.95 37.75,13.95 C7.2 37.75,13.2 36.75,12.2
  Top 0.15: 36.75,12.2 36.75,7.45 37.25,6.95 R4.1 37.5,6.7 39,6.7 42.25,3.45 | 42.25,3.45 43.5,2.2 EPD_C17.1 | 42.25,3.45 42.25,14.2 | 42.25,14.2 42.25,16.45 SJ1.1 | 36.75,12.2 25.75,12.2 | v17.75,25.2 D17.1 | D17.1 | 101.75,56.2 98.25,52.7 C8.2 98,52.45 95,49.45 95,40.7 93.5,40.7 85.5,48.7 85.5,61.45 85,61.95 U3.13 | 101.75,56.2 101.75,58.95 C10_SUPERCAP.2 | 52.25,54.2 50.5,54.2 50,54.7 50,65.2 46,69.2 D13.1 | 52.25,54.2 52.25,68.95 U1.4 52.5,69.2 56,69.2 56,70.95 U1.9 56,71.2 56,75.7 49,82.7 49,86.7 55,92.7 55,101.45 54,101.45 | FH34SRJ-24S-0.5SH_99_1.MP1 75.5,12.45 75.75,12.7 75.75,17.95 EPD_C20.1 | EPD_C16.1 77.75,23.7 76.5,22.45 76.5,18.7 76,18.2 EPD_C20.1 | 69.5,17.7 69.25,17.95 EPD_C18.1 69,18.2 66.75,18.2 EPD_C4.1 66.25,17.45 | 69.5,17.7 70.75,16.45 70.75,14.95 FH34SRJ-24S-0.5SH_99_1.8 | 69.5,17.7 71.75,19.95 EPD_C19.1 72,19.95 72.75,19.2 72.75,18.2 75.75,18.2 EPD_C20.1 | 66.25,17.45 66.25,14.95 FH34SRJ-24S-0.5SH_99_1.17 66.25,14.7 66.25,14.45 70.25,10.45 90.5,10.45 90.5,12.7 TP21.TP 90.75,12.95 105,12.95 | 61.75,18.2 61.75,12.45 FH34SRJ-24S-0.5SH_99_1.MP2 | EPD_C3.1 59.5,18.2 61.5,18.2 EPD_C13.1 61.75,18.2 | 61.75,18.2 62.25,18.2 | 62.25,18.2 63.25,18.2 EPD_C14.1 63.5,17.95 64.75,17.95 EPD_C15.1 65,17.7 65,17.45 66.25,17.45 | TP22.TP 116.25,57.7 116.25,54.95 113.5,52.2 C1_BAT3.2 113.5,51.95 113.5,49.95 R2_BAT1.1 113.25,49.7 113,49.45 113,44.95 | C1_BAT2.2 113,29.95 IC4.2 113,30.2 113,33.7 | 113,33.7 111.75,33.7 111,32.95 111,25.2 107.75,21.95 C2_BAT1.2 107.5,21.7 106,20.2 106,12.95 105,12.95 | 113,33.7 113,44.95 | 52.25,54.2 60,46.45 60,22.45 | 60,22.45 62.25,20.2 62.25,18.2
  Top 0.15: 113,44.95 101.75,56.2 | 42.25,14.2 50.25,14.2 50.25,20.95 51.75,22.45 60,22.45 | 134.25,18.45 122.75,6.95 105,6.95 105,12.95
  Bottom 0.15: v148.5,11.95 148.25,11.95 v147.5,12.7 147.25,12.95 v143,12.95 | v7.75,53.2 v11,53.2 | v17.75,25.2 18.5,25.95 v21.25,25.95
  pour Top: 170.12,0.08 170.12,67.12 92.18,67.12 92.16,67.14 92.14,67.16 92.12,67.18 92.12,111.12 0.08,111.12 0.08,0.08 59.92,0.08 59.92,10.02 59.94,10.04 59.96,10.06 59.98,10.08 78.22,10.08 78.24,10.06 78.26,10.04 78.28,10.02 78.28,0.08
  pour Bottom: 170.12,0.08 170.12,67.12 92.18,67.12 92.16,67.14 92.14,67.16 92.12,67.18 92.12,111.12 0.08,111.12 0.08,0.08 59.92,0.08 59.92,10.02 59.94,10.04 59.96,10.06 59.98,10.08 78.22,10.08 78.24,10.06 78.26,10.04 78.28,10.02 78.28,0.08
GPIO8  (via drill 0.3)
  Top 0.15: v14,39.45 14,38.95 14.75,38.95 R2.1 | v18.25,43.2 19,43.95 19,44.45 U2.10
  Bottom 0.15: v14,39.45 17.75,43.2 v18.25,43.2
I2C_PW  (via drill 0.3)
  Top 0.3: 148.75,8.95 148.75,10.7 SENSOR2.6 | 148.75,8.95 148.75,4.95 R1_PINH.2 148.75,4.7 149.5,3.95 149.5,2.7 | 149.5,2.7 155.75,2.7 156.25,3.2 156.25,3.95 155.5,4.7 R2_PINH.2 | 148.75,8.95 147.5,10.2 147.5,10.7 SENSOR2.8 147.5,10.95 147.5,11.7 148.25,12.45 148.25,13.7 SENSOR2.2 | 142.5,11.7 142.25,11.95 C1.1 | 142.5,11.7 142.75,11.45 142.75,5.45 142,4.7 C2.1 142,4.45 142,2.7 149.5,2.7 | U2.17 22.25,61.45 22.25,60.7 v37.25,45.7 | v129.5,45.7 143.75,31.45 143.75,12.95 142.5,11.7
  Bottom 0.3: v129.5,45.7 v37.25,45.7
INT_RTC  (via drill 0.3)
  Top 0.15: 76.75,46.7 v73.5,49.95 73.5,58.95 TP32.TP | 76.75,46.7 80.5,42.95 R1_PINH1.2 | v17,45.7 17,44.95 16.75,44.7 U2.8 | 76.75,46.7 81.5,51.45 81.5,54.2 82.5,54.2 82.75,53.95 82.75,53.45 83.25,52.95 U3.3
  Bottom 0.15: v17,45.7 17.5,45.2 24.5,45.2 29.25,49.95 v73.5,49.95
IO/BOOT
  Top 0.15: 25.75,106.45 28.5,106.45 R_BOOT1.1 28.75,106.2 39.25,106.2 C6.1 | 25.75,106.45 25.75,107.95 BOOT_BUTTON.4 | U2.15 24.25,91.7 25.75,93.2 25.75,106.45
IO/CHANGE  (via drill 0.3)
  Top 0.15: R_CHANGE1.1 60,108.7 v61.5,107.2 65.75,107.2 65.75,107.95 CHANGE_BUTTON.4 66,108.2 71.5,108.2 C10.1 | v23.75,72.95 14.5,63.7 14.5,62.45 14.25,62.2 U2.23
  Bottom 0.15: v23.75,72.95 46.5,95.7 50,95.7 v61.5,107.2
MISO  (via drill 0.3)
  Top 0.15: U1.2 52.25,71.45 51.5,70.7 51.5,54.95 51.25,54.7 50.5,54.7 50.5,66.2 46,70.7 D13.2 45.75,70.7 45,69.95 45,60.2 36.5,60.2 36.25,60.45 36.25,65.95 34.25,67.95 TP23.TP 34,67.95 v24.75,67.95 | 8,62.95 9,62.95 9,62.2 U2.27 | 8,62.95 7,62.95 7,51.2 6.5,50.7 6.5,12.7 7,12.2 R15.1 | 8,62.95 v8,67.95 8,102.95 5.5,102.95 4.75,102.2 4.75,93.95 5.75,93.95 J4.P7
  Bottom 0.15: v8,67.95 v24.75,67.95
MOSI  (via drill 0.3)
  Top 0.15: v60.25,69.7 60.25,69.2 U1.5 | v49.75,80.2 48.75,81.2 TP24.TP | v7.5,88.45 7.5,89.45 6,89.45 J4.P3 | v67.5,13.95 67.75,14.2 67.75,14.7 FH34SRJ-24S-0.5SH_99_1.14 | v49.75,14.7 38,26.45 38,31.95 | 38,31.95 38,35.7 R12.1 | 38,31.95 30.75,31.95 D14.2 30.5,31.95 30.5,32.7 v30.25,32.95 | v20.25,39.2 15.75,43.7 15.75,44.2 15.5,44.45 U2.7 15.5,44.7 15.5,55.95 v12.5,58.95
  Bottom 0.15: v60.25,69.7 v49.75,80.2 42,72.45 25.25,72.45 | v7.5,88.45 23.5,72.45 25.25,72.45 | v67.5,13.95 66.75,14.7 v49.75,14.7 | v20.25,39.2 26.5,32.95 v30.25,32.95 | 25.25,72.45 25.25,63.95 17.5,63.95 v12.5,58.95
N$1
  Top 0.15: FH34SRJ-24S-0.5SH_99_1.22 63.75,14.7 63.75,13.2 62,11.45 58.75,11.45 58.75,18.7 60.75,18.7 61.5,19.45 EPD_C13.2
N$11
  Top 0.15: R2_USB1.2 151.25,55.2 155.25,59.2 155.25,63.7 156,64.45 166,64.45 166,53.45 165,52.45 163.75,52.45 J2.A5
N$12  (via drill 0.3)
  Top 0.15: 67.25,14.95 66.75,14.95 FH34SRJ-24S-0.5SH_99_1.16 | v68.5,18.7 69,19.2 EPD_C18.2 | v68.5,16.95 67.25,15.7 67.25,14.95 | 67.25,14.95 FH34SRJ-24S-0.5SH_99_1.15
  Bottom 0.15: v68.5,16.95 v68.5,18.7
N$15
  Top 0.15: R2_USB.1 157.5,58.2 163,58.2 163,59.95 163.25,60.2 165.5,60.2 165.5,56.2 164.75,55.45 163.75,55.45 J2.B5
N$16  (via drill 0.3)
  Top 0.15: v112.5,30.95 112.5,30.45 112.25,30.2 IC4.1 | v113.5,30.95 114,30.45 114,30.2 IC4.3 114.25,29.95 114.25,28.45 119.5,23.2 D2.1 | v123.5,40.95 123.5,47.95 127.5,51.95 C1_BAT1.1
  Bottom 0.15: v112.5,30.95 v113.5,30.95 v123.5,40.95
N$17
  Top 0.15: C4.1 52.5,20.2 53.25,19.45 53.25,3.2 D4.1 53.25,2.95 53.25,1.45 43,1.45 42.25,2.2 42.25,2.95 29.5,2.95 D3.2
N$18
  Top 0.15: R1_BAT1.2 122.75,57.95 122.5,57.7 122.5,53.45 MCP1.1
N$19  (via drill 0.3)
  Top 0.15: v113.75,58.95 113,58.95 CHG_LED.C | v121,58.95 121.5,58.45 121.5,58.2 R1_BAT1.1
  Bottom 0.15: v121,58.95 v113.75,58.95
N$20  (via drill 0.3)
  Top 0.15: v113,50.7 112.25,49.95 R2_BAT1.2 | v121.75,51.7 122.25,51.2 122.25,50.95 MCP1.5
  Bottom 0.15: v113,50.7 114,51.7 v121.75,51.7
N$21  (via drill 0.3)
  Top 0.15: v62.25,17.7 62.25,15.45 62.75,14.95 FH34SRJ-24S-0.5SH_99_1.24 | v60.25,19.2 59.5,19.2 EPD_C3.2
  Bottom 0.15: v62.25,17.7 60.75,19.2 v60.25,19.2
N$22  (via drill 0.3)
  Top 0.15: v64.75,16.95 64.75,14.95 FH34SRJ-24S-0.5SH_99_1.20 | v65.75,18.2 65,18.95 EPD_C15.2
  Bottom 0.15: v64.75,16.95 64.75,18.2 v65.75,18.2
N$23  (via drill 0.3)
  Top 0.15: v65.25,16.2 65.25,14.95 FH34SRJ-24S-0.5SH_99_1.19 | v77,24.7 77.75,24.7 77.75,24.95 EPD_C16.2
  Bottom 0.15: v65.25,16.2 73.75,24.7 v77,24.7
N$24
  Top 0.15: FH34SRJ-24S-0.5SH_99_1.18 65.75,14.7 65.75,14.2 62,10.45 58,10.45 58,2.95 57.5,2.45 54.25,2.45 54.25,19.7 53,20.95 51.75,20.95 51.75,17.2 52.75,16.2 52.75,12.2 43.75,3.2 EPD_C17.2
N$25
  Top 0.15: FH34SRJ-24S-0.5SH_99_1.5 72.25,14.95 72.25,18.45 72,18.7 EPD_C19.2
N$26
  Top 0.15: FH34SRJ-24S-0.5SH_99_1.4 72.75,14.7 72.75,13.2 74.5,11.45 78.75,11.45 78.75,25.45 78.5,25.7 76,25.7 76,19.45 EPD_C20.2
N$27  (via drill 0.3)
  Top 0.15: v25.25,93.45 22.25,93.45 C_DELAY1.2 | v49.5,96.2 50.25,96.2 50.25,96.45 IC2.5
  Bottom 0.15: v25.25,93.45 28,96.2 v49.5,96.2
N$28
  Top 0.15: D7.1 94.25,41.45 94.5,41.7 94.5,64.95 95.5,65.95 R_CAPACITOR.2
PREVGH  (via drill 0.3)
  Top 0.15: v64.25,16.45 64.25,14.95 FH34SRJ-24S-0.5SH_99_1.21 | v64.25,18.45 63.5,19.2 EPD_C14.2 63.5,19.45 63.5,23.45 68.75,28.7 D5.1
  Bottom 0.15: v64.25,18.45 v64.25,16.45
PREVGL  (via drill 0.3)
  Top 0.15: v63.25,17.2 63.25,14.95 FH34SRJ-24S-0.5SH_99_1.23 | v65.75,18.95 66.75,18.95 EPD_C4.2 | v57.5,16.2 57.5,3.7 57,3.2 D4.2
  Bottom 0.15: v65.75,18.95 63.25,18.95 v63.25,17.2 58.5,17.2 v57.5,16.2
RESE  (via drill 0.3)
  Top 0.15: v73.25,13.95 73.25,14.7 FH34SRJ-24S-0.5SH_99_1.3 | v52.25,12.45 52.25,13.95 Q3.2 | v41.75,12.45 37,17.2 37,19.95 37.75,20.7 R11.2
  Bottom 0.15: v73.25,13.95 71.75,12.45 v52.25,12.45 v41.75,12.45
RESE'
  Top 0.15: R3.2 32.25,19.45 36.5,19.45 36.5,20.7 37.5,21.7 38.75,21.7 38.75,20.45 38,19.7 R11.1 38,19.45 38,18.95 40.5,16.45 SJ1.2
RESET  (via drill 0.3)
  Top 0.15: 53,107.95 53.25,108.2 C5.1 | 53,107.95 52.5,107.45 52.5,96.7 53,96.7 IC2.1 | 53,107.95 51,107.95 RESET_BUTTON.4 50.75,108.2 47.5,108.2 RESET_BUTTON.3 47.25,107.95 43,107.95 36.75,101.7 R_RESET1.1 36.75,101.45 v36.75,60.7 | v10.5,48.2 10.5,44.7 U2.3
  Bottom 0.15: v10.5,48.2 23,60.7 v36.75,60.7
RTC_RST  (via drill 0.3)
  Top 0.15: v23.5,60.2 23.5,61.45 23,61.95 U2.16 | v82.25,55.7 84.75,53.2 84.75,52.95 U3.4
  Bottom 0.15: v23.5,60.2 28,55.7 v82.25,55.7
RX
  Top 0.15: U2.24 13,62.2 13.25,62.45 13.25,69.95 15.75,72.45 TP19.TP
SCK  (via drill 0.3)
  Top 0.15: TP25.TP 50.25,85.95 58.25,77.95 58.25,72.2 60,70.45 U1.6 60,70.2 v52.75,62.95 | v68.25,13.95 68.25,14.7 FH34SRJ-24S-0.5SH_99_1.13 | R13.1 15.25,11.95 v16.25,12.95 16.25,22.95 19.75,26.45 | 19.75,26.45 20,26.7 D15.2 | 19.75,26.45 19.75,37.2 14.5,42.45 14.5,44.2 14.25,44.45 U2.6 14,44.7 14,44.95 v11.5,47.45 | v4.5,62.7 4.5,91.45 5.75,91.45 J4.P5
  Bottom 0.15: v68.25,13.95 67.25,12.95 v16.25,12.95 | 4.5,58.45 4.5,47.45 v11.5,47.45 | 4.5,58.45 v4.5,62.7 | v52.75,62.95 51.5,61.7 16,61.7 12.75,58.45 4.5,58.45
SCL  (via drill 0.3)
  Top 0.15: 154,4.95 150.25,8.7 150.25,13.2 149.75,13.7 SENSOR2.4 | 154,4.95 155.25,3.7 R2_PINH.1 | 154,4.95 166,16.95 166,20.45 164.75,20.45 J1.4 v164.5,37.7 | v131,60.45 131,61.2 U4.7 | v81.75,60.7 81,61.45 81,61.95 U3.16 | v18.5,60.7 18.5,61.45 18,61.95 U2.20
  Bottom 0.15: v18.5,60.7 19,61.2 81.25,61.2 v81.75,60.7 130.75,60.7 v131,60.45 139.75,51.7 153.75,51.7 153.75,48.45 v164.5,37.7
SDA  (via drill 0.3)
  Top 0.15: v19.75,63.2 19.75,62.7 19.25,62.2 U2.19 | v81.5,63.45 82,62.95 82,62.2 U3.15 | 131.75,60.95 147.5,45.2 147.5,16.95 | 131.75,60.95 131.5,61.2 U4.8 | 147.5,16.95 147.5,15.45 147.75,15.2 | 147.75,15.2 148.75,14.2 148.75,13.95 SENSOR2.3 | 147.75,15.2 146.75,14.2 146.75,5.45 148.5,3.7 R1_PINH.1 | 147.5,16.95 165.25,16.95 165.5,17.2 165.5,19.45 164.75,19.45 J1.3 | 131.75,60.95 v132,61.2
  Bottom 0.15: v19.75,63.2 20,63.45 v81.5,63.45 83.75,61.2 v132,61.2
SRC  (via drill 0.3)
  Top 0.15: Q3.3 51.25,16.45 51.25,21.45 52.25,21.45 C4.2 52.5,21.7 v58.25,21.7 | L1.1 75.75,32.2 69,32.2 D5.2 68.75,32.2 v68,31.45
  Bottom 0.15: v68,31.45 v58.25,21.7
SS_SD  (via drill 0.3)
  Top 0.15: D18.2 11.25,26.45 11.5,26.7 11.5,44.45 U2.4 11.5,44.7 11,45.2 11,52.2 10.5,52.7 v10.5,60.45 | v17.5,99.45 23,99.45 R17.1 | v7,88.95 6.25,88.2 J4.P2
  Bottom 0.15: v17.5,99.45 v7,88.95 4.25,88.95 4.25,66.7 v10.5,60.45
TX
  Top 0.15: U2.25 11.5,62.2 11.5,72.45 TP18.TP
USB_D+  (via drill 0.3)
  Top 0.15: v149.75,47.95 151.75,47.95 D1.3 | v25.75,44.7 24.25,44.7 U2.14
  Bottom 0.15: v149.75,47.95 146.5,44.7 v25.75,44.7
USB_D-  (via drill 0.3)
  Top 0.15: v149.75,49.7 151.75,49.7 D1.1 | v25.25,45.2 25,45.45 23,45.45 23,44.7 U2.13
  Bottom 0.15: v149.75,49.7 145.25,45.2 v25.25,45.2
VBAT
  Top 0.3: C2_BAT1.1 107.5,20.45 106.5,19.45 106.5,9.7 TP20.TP 106.5,9.45 113.25,9.45 113.25,8.7 114.25,7.7 122.75,7.7 122.75,48.95 121.25,50.45 121.25,51.45 120.5,52.2 120.5,53.2 MCP1.3 120.25,53.45 120.25,64.2 | 130.5,63.45 131,63.45 U4.2 | 120.25,64.2 120.25,65.95 116.75,65.95 Q1.3 | 130.5,63.45 130.5,63.95 130.25,64.2 120.25,64.2 | 130.5,63.45 U4.3
VBUS  (via drill 0.3)
  Top 0.3: C4_USB.1 163,38.7 160.25,41.45 160.25,43.7 C5_USB.1 160,43.95 153.25,43.95 | 153.25,43.95 v153.25,43.7 153.25,39.2 PFMF.050.1.2 | 153.25,43.95 153.25,48.7 154.25,48.7 D1.5 | TP31.TP 120.75,9.2 120.75,23.95 119.75,24.95 D2.2 119.75,25.2 122,27.45 v122,43.7 120.5,45.2 120.5,50.7 MCP1.4 120.25,50.95 119.75,51.45 119.75,59.2 114.5,59.2 | C1_BAT3.1 112.25,52.2 112.25,56.95 112.75,57.45 CHG_LED.A 113,57.45 114.5,58.95 114.5,59.2 | 114.5,59.2 114.5,62.95 115.5,63.95 Q1.1 | v128,43.7 129,43.7 R1_PWRUSB.2
  Bottom 0.3: v122,43.7 v128,43.7 v153.25,43.7
VRTC  (via drill 0.3)
  Top 0.3: v101.75,55.45 101.75,54.95 98.25,51.45 C8.1 | v103,56.7 103,58.95 C10_SUPERCAP.1 | 94,65.95 83.5,65.95 83.5,62.2 U3.14 | 94,65.95 94.25,65.95 R_CAPACITOR.1 94,65.95 | 94,65.95 v94,60.2
  Bottom 0.3: v103,56.7 v101.75,55.45 97,60.2 v94,60.2
VUSB  (via drill 0.3)
  Top 0.3: J2.A4 163.75,51.2 163.75,51.45 J2.B9 163.5,51.45 162.25,51.45 v162.25,52.2 162.25,55.2 163,55.95 163.5,55.95 J2.B4 163.75,55.95 163.75,56.2 J2.A9 | v151.5,52.2 149,49.7 149,39.2 PFMF.050.1.1
  Bottom 0.3: v151.5,52.2 v162.25,52.2